# EAGLE board Nusbio 2-FT232BreakOut (EAGLE 7.5.0)

Size 35 x 42 mm. Coordinates in mm from the lower left corner, seen from the top.
Outline: 0,0 35,0 35,42 0,42 0,0
Copper layers (1*16): Top 0.035mm / dielectric 1.5mm / Bottom 0.035mm
Design rules "default": minimum track width 10mil, minimum drill 24mil, track to track 8mil, track to pad 8mil, pad to pad 8mil, via to via 8mil, smd to smd 8mil, copper to edge 40mil, drill to drill 8mil, minimum pad ring 10mil, minimum via ring 8mil, stop-mask expansion 4mil, vias tented up to drill 0mil, thermal gap 10mil

## Footprints (pad centres in the part's own frame; a part is rotated, then mirrored left to right if it is on the bottom)
1X02 = drill 1.016 long: 1 -1.27,0; 2 1.27,0
1X10 = drill 1.016 long: 1 -11.43,0; 2 -8.89,0; 3 -6.35,0; 4 -3.81,0; 5 -1.27,0; 6 1.27,0; 7 3.81,0; 8 6.35,0; 9 8.89,0; 10 11.43,0

## Placement (x,y rotation side)
EX_C  [1X02]  32,40 0 top
FT232_C_10_GPIO  [1X10]  2,14 270 top
FT232_D_DPIN_SPI  [1X10]  22,14 90 top
NUSBIO_10_PIN_HEADER  [1X10]  14,40 180 top
NUSBIO_SPI_10_PIN_HEADER  [1X10]  33,14 90 top

## Library data of the parts
EX_C FT232_C_10_GPIO FT232_D_DPIN_SPI NUSBIO_10_PIN_HEADER NUSBIO_SPI_10_PIN_HEADER = pinhead

## Nets
C8: EX_C.1 FT232_C_10_GPIO.9
C9: EX_C.2 FT232_C_10_GPIO.10
D0_CLCK: FT232_D_DPIN_SPI.3 NUSBIO_SPI_10_PIN_HEADER.1
D1_MOSI: FT232_D_DPIN_SPI.4 NUSBIO_SPI_10_PIN_HEADER.2
D2_MISO: FT232_D_DPIN_SPI.5 NUSBIO_SPI_10_PIN_HEADER.3
D3_CS1: FT232_D_DPIN_SPI.6 NUSBIO_SPI_10_PIN_HEADER.4
D4_CS2: FT232_D_DPIN_SPI.7 NUSBIO_SPI_10_PIN_HEADER.5
D5_CS3: FT232_D_DPIN_SPI.8 NUSBIO_SPI_10_PIN_HEADER.6
D6_CS4: FT232_D_DPIN_SPI.9 NUSBIO_SPI_10_PIN_HEADER.7
D7_CS5: FT232_D_DPIN_SPI.10 NUSBIO_SPI_10_PIN_HEADER.8
GND: FT232_D_DPIN_SPI.2 NUSBIO_10_PIN_HEADER.10 NUSBIO_SPI_10_PIN_HEADER.10
GPIO0: FT232_C_10_GPIO.1 NUSBIO_10_PIN_HEADER.1
GPIO1: FT232_C_10_GPIO.2 NUSBIO_10_PIN_HEADER.2
GPIO2: FT232_C_10_GPIO.3 NUSBIO_10_PIN_HEADER.3
GPIO3: FT232_C_10_GPIO.4 NUSBIO_10_PIN_HEADER.4
GPIO4: FT232_C_10_GPIO.5 NUSBIO_10_PIN_HEADER.5
GPIO5: FT232_C_10_GPIO.6 NUSBIO_10_PIN_HEADER.6
GPIO6: FT232_C_10_GPIO.7 NUSBIO_10_PIN_HEADER.7
GPIO7: FT232_C_10_GPIO.8 NUSBIO_10_PIN_HEADER.8
VCC: FT232_D_DPIN_SPI.1 NUSBIO_10_PIN_HEADER.9 NUSBIO_SPI_10_PIN_HEADER.9

## Tracks (layer width: path | path; a pad name or v marks a point on that pad's centre or on a via)
C8  (1 unrouted)
C9  (1 unrouted)
D0_CLCK  (1 unrouted)
D1_MOSI  (1 unrouted)
D2_MISO  (1 unrouted)
D3_CS1  (1 unrouted)
D4_CS2  (1 unrouted)
D5_CS3  (1 unrouted)
D6_CS4  (1 unrouted)
D7_CS5  (1 unrouted)
GND  (2 unrouted)
GPIO0  (1 unrouted)
GPIO1  (1 unrouted)
GPIO2  (1 unrouted)
GPIO3  (1 unrouted)
GPIO4  (1 unrouted)
GPIO5  (1 unrouted)
GPIO6  (1 unrouted)
GPIO7  (1 unrouted)
VCC  (2 unrouted)

## Text on the board
tNames: GND | VCC | 7 | 6 | 5 | 4 | 3 | 2 | 1 | 0 | C8 | C9 | NUSBIO G2 PROTO 1 | NUSBIO G2 PROTO 1 | SPI | SPI | GND | VCC | D7CS4 | D6CS3 | D5CS2 | D4CS1 | D3CS0 | MISO | MOSI | CLOCK | PCBv1 FT2016.02